# Altium PCB Power1.PcbDoc
Units mil, origin at the board's own origin, x right, y up, seen from the top; angles counter-clockwise.
Board outline 1574.8 x 2165.35 mil, 2 copper layers (Top Layer, Bottom Layer); 18 components, 6 nets, 42 pads, 0 vias.
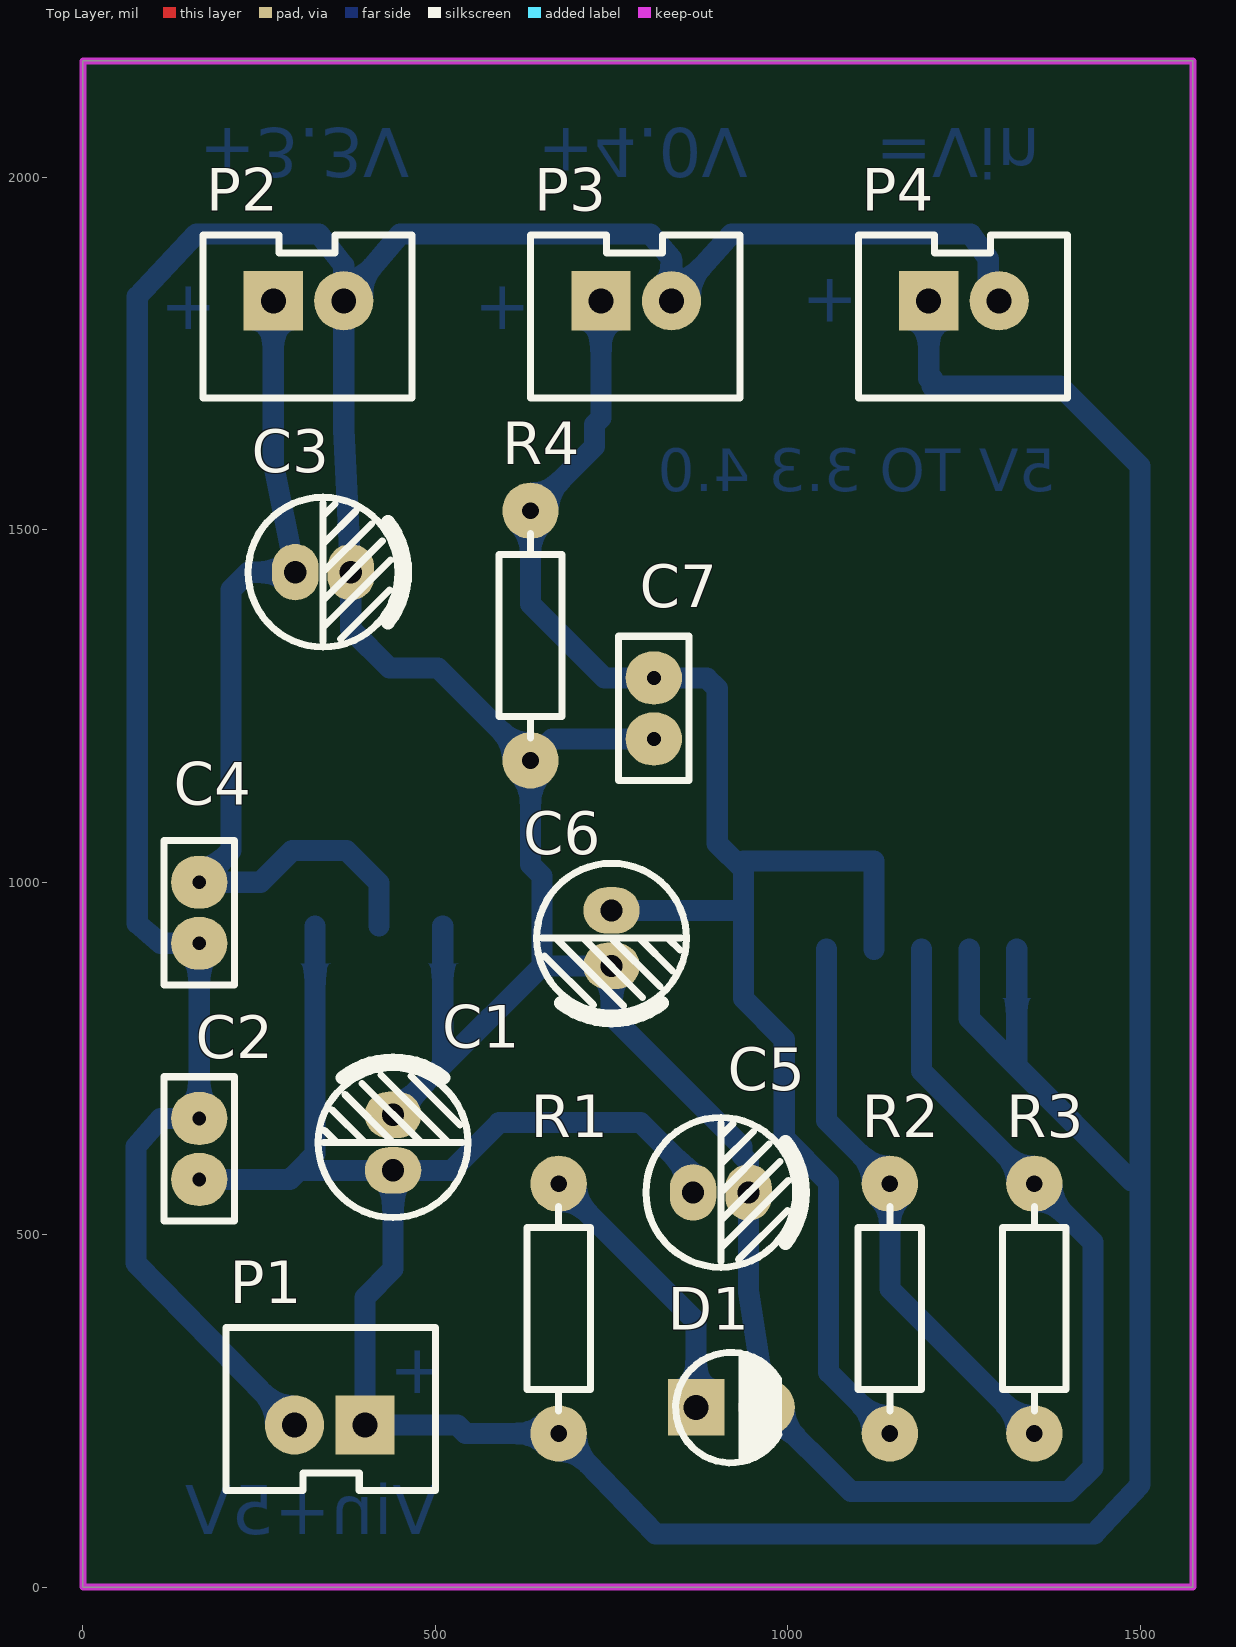
[diagram p0: Top Layer view]
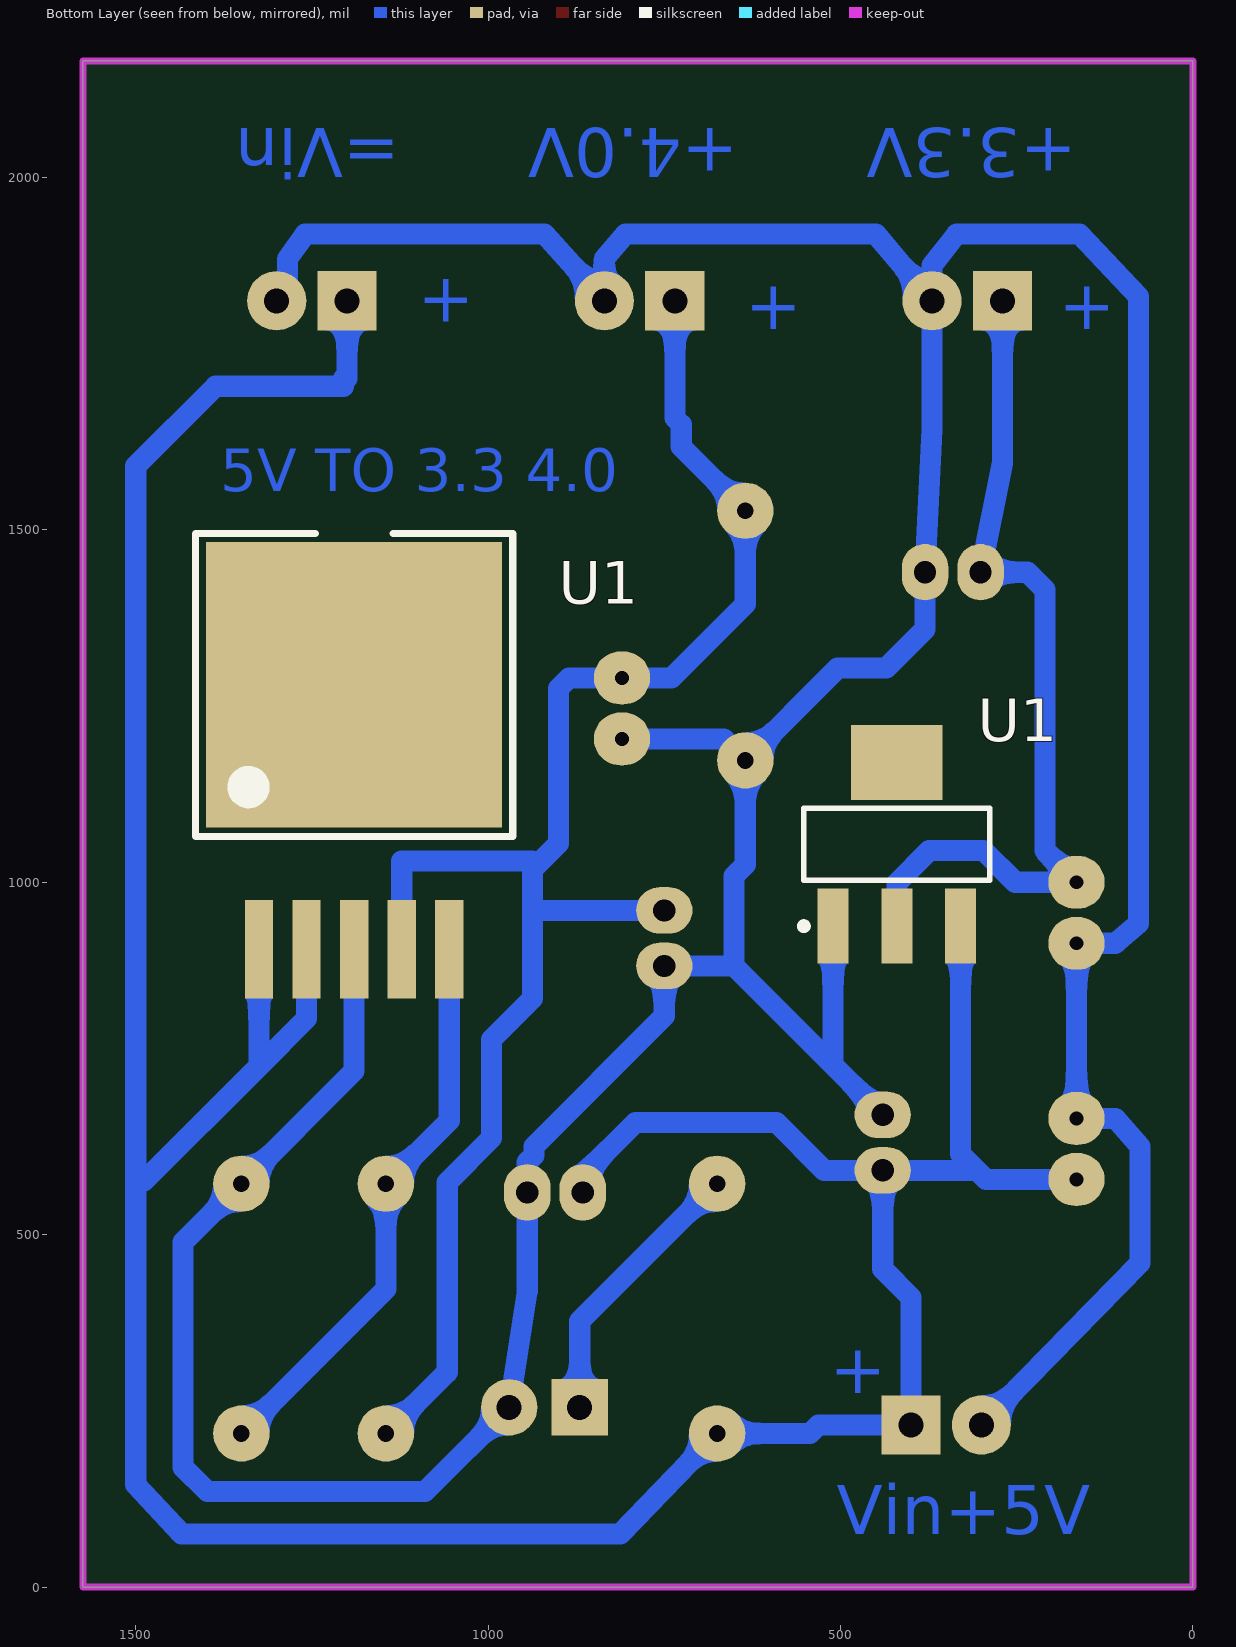
[diagram p1: Bottom Layer view, seen from below]
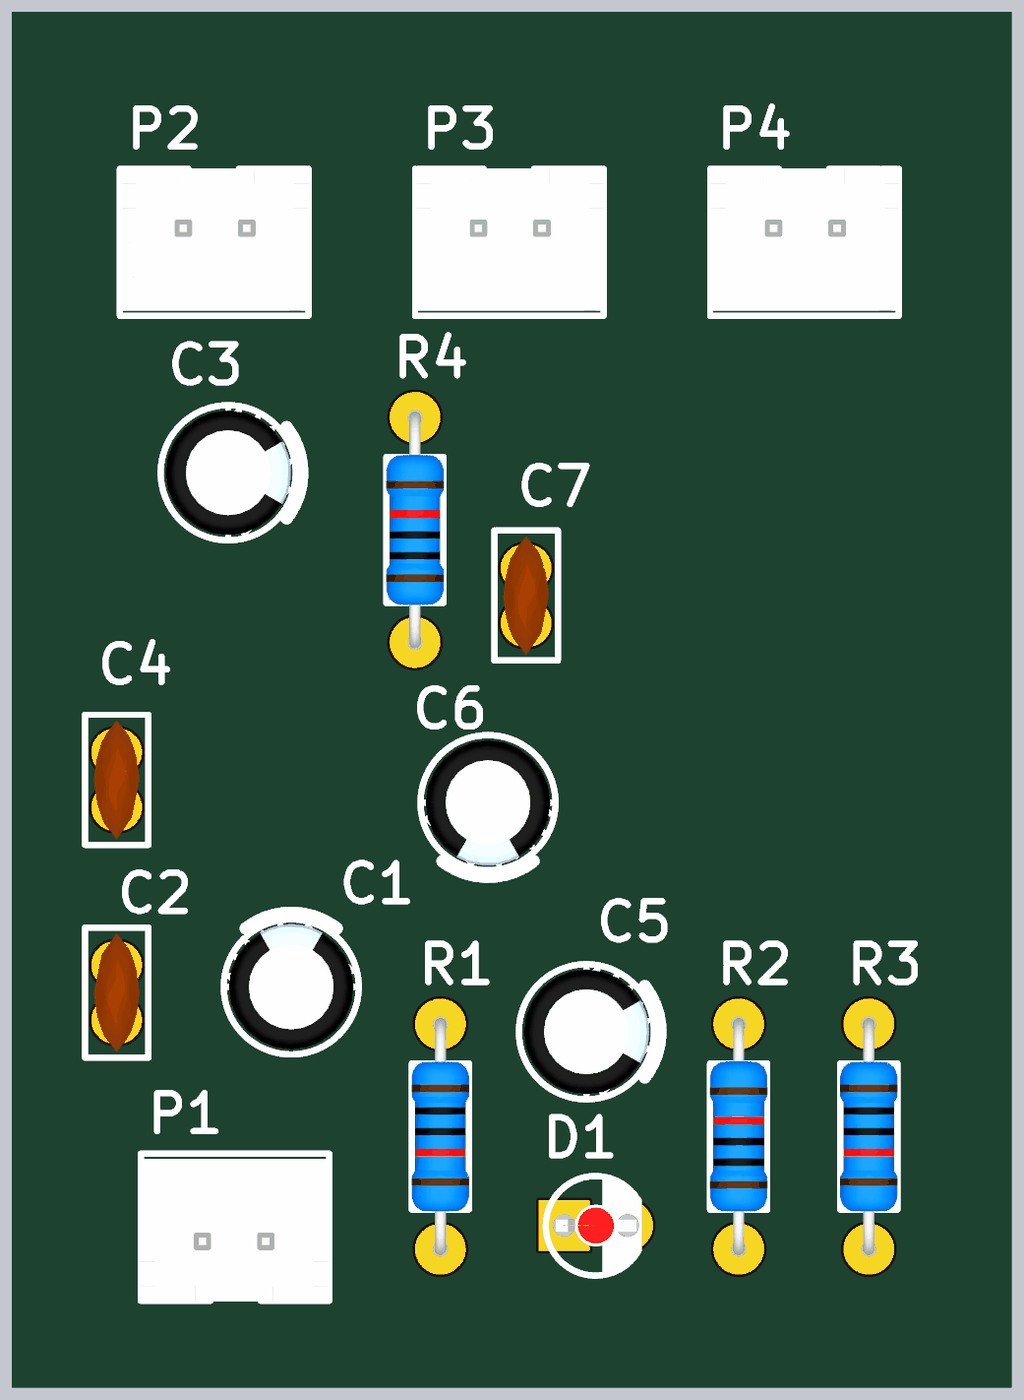
[diagram p2: 3D render of the assembled board from above, using the file's embedded part models]

## Layer stack, top to bottom
Top Solder: solder mask 0.4, Solder Resist, Dk 3.5
Top Layer: signal copper 1.4
Dielectric 1: dielectric 12.6, FR-4, Dk 4.8
Bottom Layer: signal copper 1.4
Bottom Solder: solder mask 0.4, Solder Resist, Dk 3.5

## Board outline
0,0 1574.8,0 1574.8,2165.35 0,2165.35

## Design rules (kind name [scope] priority, off if disabled: settings)
Clearance [All] p1: gap=30
PolygonConnect [All] p1: connectstyle=Relief reliefconductorwidth=10 reliefentries=4 polygonreliefangle="90 Angle" airgapwidth=10
RoutingLayers [All] p1: top layer_v5=FALSE bottom layer_v5=TRUE
RoutingVias [All] p1: holewidth=28 width=50 viastyle="Through Hole" minholewidth=28 minwidth=50 maxholewidth=28 maxwidth=50
SolderMaskExpansion [All] p1: expansion=4
Width [All] p1: maxlimit=30 minlimit=20 preferedwidth=25 minimp=50.000000 maximp=50.000000 favimp=50.000000
29 further rules are at their usual default settings.

## Classes and differential pairs
component class Power: C1 C2 C3 C4 C5 C6 C7 D1 P1 P2 P3 P4 R1 R2 R3 R4 U1

## Components (designator, comment, footprint, x,y, rotation, side; value= is the part's Value field where it differs from the comment)
C1 "Cap Pol1" "CAP 2.0*5*11 - BK" 440,630.63 r90 top
C2 "Cap" "CC 2.2*5" 165,578.39 r270 top
C3 "Cap Pol1" "CAP 2.0*5*11 - BK" 340.63,1440 r0 top
C4 "Cap" "CC 2.2*5" 165,1000 r90 top
C5 "Cap Pol1" "CAP 2.0*5*11 - BK" 905,560 r0 top
C6 "Cap Pol1" "CAP 2.0*5*11 - BK" 750,920.63 r270 top
C7 "Cap" "CC 2.2*5" 810,1290 r90 top
D1 "LED0" "LED 3MM-R" 920,255 r0 top
P1 "Vin+5V" XH2.54-2P 400,230 r180 top
P2 "Vout+3.3V" XH2.54-2P 270,1825 r0 top
P3 "Vout+4.0V" XH2.54-2P 735,1825 r0 top
P4 "Vout+5.0V" XH2.54-2P 1200,1825 r0 top
R1 "Res1" "RS 1/4W" 675,395 r270 top
R2 "Res1" "RS 1/4W" 1145,395 r90 top
R3 "Res1" "RS 1/4W" 1350,395 r270 top
R4 "Res1" "RS 1/4W" 635,1350 r90 top
U1 "AMS1117-3V3" SOT223_M 420,1053.86 r90 bottom
U1 "MIC29302WU" TO263-5 1190,1165 r180 bottom

## Footprints (in the part's own frame and the unit in brackets; to place one, negate y for a bottom-side part, rotate by r counter-clockwise, add the part's x,y. Pads: shape width x height; smd on the part's side, far side on the other; paste and mask are expansions set on the pad)
"CAP 2.0*5*11 - BK" [mil] "脚距2mm直径5mm高度11mm"
  oval 66x80 hole 31.5: 1(-39.37,0) 2(39.37,0)
  silkscreen extent -106,-106 117,106, body extent -98,-98 99,98, height 435
"CC 2.2*5" [mm] "脚距2.2mm直径5mm"
  oval 1.905x2.032 hole 0.5: 1(-2.2,0) 2(0,0)
  silkscreen extent -3.7,-1.27 1.5,1.27, body extent -3.5,-0.92 1.3,0.92, height 4.8
"LED 3MM-R" [mil] "红色3mm直插LED"
  rect 80x80 hole 35.43: 1(-50,0)
  round 80 hole 35.43: 2(50,0)
  silkscreen extent -79,-79 68,78, body extent -77,-77 65,77, height 219
"RS 1/4W" [mil] "直插色环电阻，脚距9mm，直径2.3mm"
  round 80 hole 23.62: 1(-177.17,0) 2(177.17,0)
  silkscreen extent -145,-45 145,45, body extent -186,-46 186,46, height 91
SOT223_M [mm] "6.4x7x1.6mm(长宽高)"
  rect 2.7x1.118 smd: 1(-2.95,2.3) 2(-2.95,0) 3(-2.95,-2.3)
  rect 2.7x3.3 smd: 4(2.95,0)
  silkscreen extent -3.07,-3.35 1.3,3.48, body extent -1.85,-3.35 1.85,3.35, height 1.7
TO263-5 [mil] "D2PACK, TO-263 Case, 5 Lead, SMD Power IC"
  rect 40x140 smd: 1(-135,-260) 2(-67.5,-260) 3(0,-260) 4(67.5,-260) 5(135,-260)
  rect 420x405 smd: ""(0,115)
  silkscreen extent -225,-100 225,330, body extent -200,-260 200,300, height 192
XH2.54-2P [mil] "接插件，2P"
  rect 84x84 hole 35.43: 1(0,0)
  round 84 hole 35.43: 2(100,0)
  silkscreen extent -100,-138 197,93, body extent -98,-130 198,94, height 278

## Part data
C1 C3 C5 C6: "Polarized Capacitor (Radial)"
C2 C4 C7: "Capacitor"
D1: "Typical INFRARED GaAs LED"
P1 P2 P3 P4: library part "Header 2", "2P接插件"
R1 R2 R3 R4: "Resistor"
U1: library part AMS1117, "三端稳压芯片"
U1: "2A,  adjustable LDO"

## Nets (pads, with @x,y where several pads share a name; then routed paths per layer and width w, separated by ;. In a path a pad name is that pad's centre, name@x,y a point inside that pad or via, vN(x,y) a via of type N, cw(c..) or ccw(c..) an arc to the next point about the centre after c; other vN are vias at no path point)
GND: C1.2 C2.1 C3.2 C4.1 C5.2 C6.2 C7.1 D1.2 P1.2 P2.2 P3.2 P4.2 R3.1 R4.1 U1.3@1190,905 | length 7323.2
  Bottom Layer w30: P1.2 75,460 75,625 110,665 C2.1 C4.1 110,913.39 77,941.39 77,1831 161,1920 335,1920 370,1875 P2.2 ; C1.2 510.55,740.55 ; 510.55,937.72 510.55,740.55 ; R4.1@651.26,1189.09 665.55,1203.39 C7.1 ; U1.3@1190,905 1190,732.17 R3.1 1433,489.17 1433,170 1398.33,135.33 1089.67,135.33 D1.2 944.37,419.63 C5.2 944.37,602.78 935,612.15 935,625 750,810 C6.2 651.26,881.26 ; P4.2 1284.5,1840.5 1284.5,1884.6 1259.6,1919.5 920,1920 P3.2 835,1885 805,1920 450,1920 P2.2 ; P2.2 370,1643 C3.2 380,1359 435,1304 503.83,1304 R4.1 635,1025 651.26,1008.74 651.26,881.26 ; 510.55,740.55 651.26,881.26
NetD1_1: D1.1 R1.1 | length 397.9
  Bottom Layer w30: R1.1 870,377.17 D1.1
NetR2_2: R2.2 R3.2 U1.5 | length 809.4
  Bottom Layer w30: U1.5 1055,662.17 R2.2 1145,422.83 R3.2
VCC3.3: C3.1 C4.2 P2.1 | length 1277.4
  Bottom Layer w30: P2.1 270,1595 C3.1 235,1440 210,1415 210,1045 C4.2 252,1000 297,1045 374,1045 420,999 420,937.72
VCC4.0: C6.1 C7.2 P3.1 R2.1 R4.2 U1.4@1122.5,905 | length 2454.3
  Bottom Layer w30: P3.1 735,1658.64 725.98,1649.63 725.98,1618.15 R4.2 635,1395 740,1290 C7.2 885,1290 900,1275 900,1055 937,1018 ; C6.1 937,960 ; U1.4@1122.5,905 1122.5,1030 937,1030 937,1018 ; R2.1 1058,304.83 1058,574 995,637 995,777 937,835 937,960 ; 937,960 937,1018
VCC5: C1.1 C2.2 C5.1 P1.1 P4.1 R1.2 U1.1@1325,905 U1.2@1257.5,905 | length 5223.2
  Bottom Layer w30: C2.2 293.39,578.39 306.26,591.26 ; 329.45,937.72 329.45,614.45 306.26,591.26 ; C5.1 865.63,584.37 791,659 590.74,659 523,591.26 C1.1 ; P4.1 1200,1715 1205,1715 1205,1703.73 1386.9,1703.73 1500,1590.63 1500,145.33 1435,75.33 812.5,75.33 R1.2 543.17,217.83 531,230 P1.1 400,411 440,451 C1.1 ; U1.2@1257.5,905 1257.5,806.5 1325,739 ; U1.1@1325,905 1325,739 ; 1488,576 1325,739 ; 306.26,591.26 C1.1
pads on no net: U1. U1.1@510.55,937.72 U1.2@420,937.72 U1.3@329.45,937.72 U1.4@420,1170

## Keep-outs
Keep-Out Layer:
  the board outline again, w10

## Other copper
Bottom Layer:
  text "+3.3V" at 165,2070 h70 r180
  text "+4.0V" at 645,2070 h70 r180
  text "=Vin" at 1125,2070 h70 r180
  text "+" at 1100,1795 h70
  text "+" at 190,1785 h70
  text "+" at 635,1785 h70
  text "5V TO 3.3 4.0" at 1380,1555 h60
  text "+" at 515,275 h70
  text "Vin+5V" at 505,75 h70